# EAGLE board drive (EAGLE 6.2)
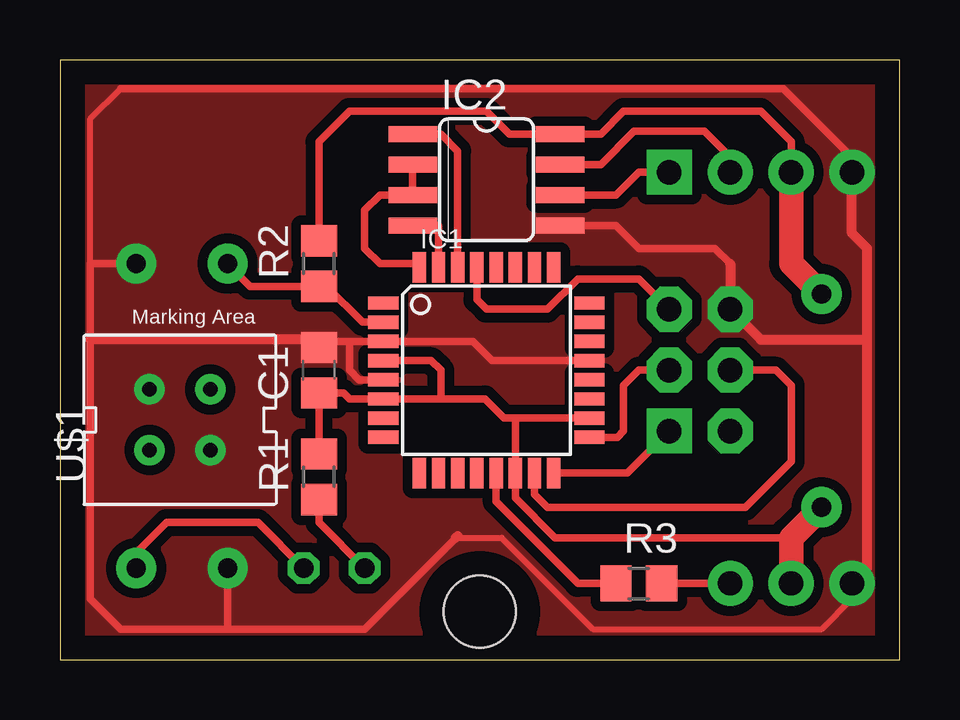
[diagram p0: board, top side]
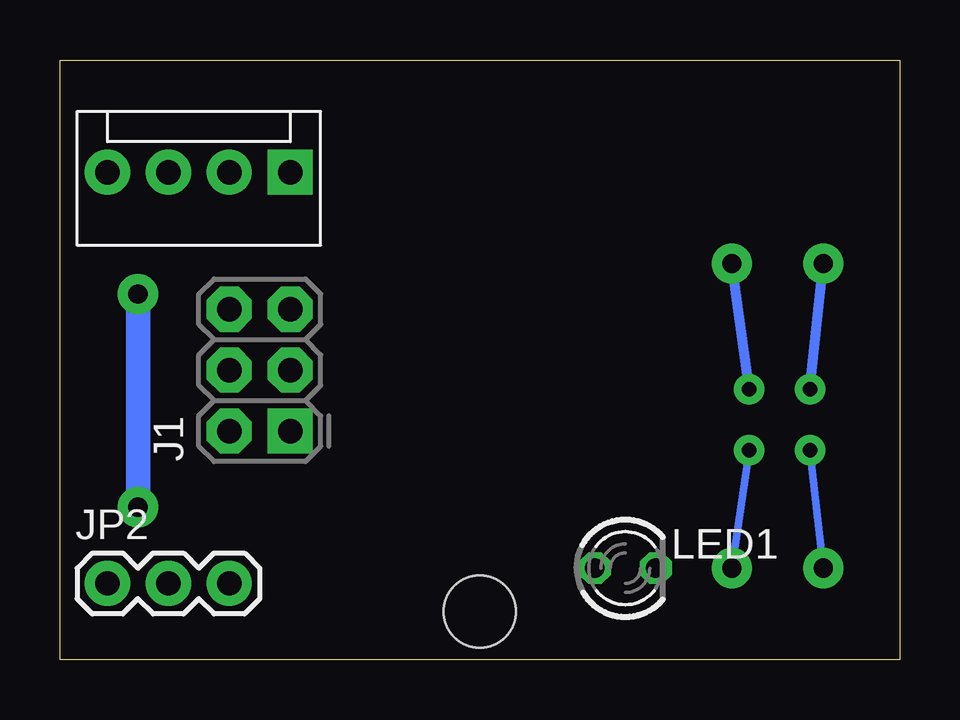
[diagram p1: board, bottom side, seen from below]

Size 35 x 25 mm. Coordinates in mm from the lower left corner, seen from the top.
Outline: 0,0 35,0 35,25 0,25 0,0
Copper layers (1*16): Top 0.035mm / dielectric 1.5mm / Bottom 0.035mm
Design rules "default *": minimum track width 0.25mm, minimum drill 0.5mm, track to track 8mil, track to pad 8mil, pad to pad 8mil, via to via 8mil, smd to smd 8mil, copper to edge 40mil, drill to drill 8mil, minimum pad ring 10mil, minimum via ring 8mil, stop-mask expansion 4mil, vias tented up to drill 0mil, thermal gap 10mil
Holes 3 mm at 17.5,2

## Footprints (pad centres in the part's own frame; a part is rotated, then mirrored left to right if it is on the bottom)
C0805 = smd 1.3 x 1.5: 1 -0.95,0; 2 0.95,0
TQFP32-08 = smd 1.27 x 0.559: 1 -4.293,2.8; 2 -4.293,2; 3 -4.293,1.2; 4 -4.293,0.4; 5 -4.293,-0.4; 6 -4.293,-1.2; 7 -4.293,-2; 8 -4.293,-2.8; 17 4.293,-2.8; 18 4.293,-2; 19 4.293,-1.2; 20 4.293,-0.4; 21 4.293,0.4; 22 4.293,1.2; 23 4.293,2; 24 4.293,2.8 | smd 0.559 x 1.27: 9 -2.8,-4.293; 10 -2,-4.293; 11 -1.2,-4.293; 12 -0.4,-4.293; 13 0.4,-4.293; 14 1.2,-4.293; 15 2,-4.293; 16 2.8,-4.293; 25 2.8,4.293; 26 2,4.293; 27 1.2,4.293; 28 0.4,4.293; 29 -0.4,4.293; 30 -1.2,4.293; 31 -2,4.293; 32 -2.8,4.293
SO08 = smd 0.66 x 2.032: 1 -1.905,-3.073; 2 -0.635,-3.073; 3 0.635,-3.073; 4 1.905,-3.073; 5 1.905,3.073; 6 0.635,3.073; 7 -0.635,3.073; 8 -1.905,3.073
2X3-NS = drill 1.016 pad 1.88 square: 1 -2.54,-1.27 | drill 1.016 pad 1.88 octagon: 2 -2.54,1.27; 3 0,-1.27; 4 0,1.27; 5 2.54,-1.27; 6 2.54,1.27
MOLEX-1X4 = drill 1.016 pad 1.88 square: 1 0,0 | drill 1.016 pad 1.88: 2 2.54,0; 3 5.08,0; 4 7.62,0
1X03 = drill 1.016 pad 1.88: 1 0,0; 2 2.54,0; 3 5.08,0
LED3MM = drill 0.813 octagon: A -1.27,0; K 1.27,0
R0805 = smd 1.3 x 1.5: 1 -0.95,0; 2 0.95,0
4 = drill 0.61 pad 1.27: A -1.27,1.27; C 1.27,-1.27; E 1.27,1.27; K -1.27,-1.27

## Placement (x,y rotation side)
C1  100nF  [C0805]  10.79,12.06 90 top
IC1  MEGA8-AI  [TQFP32-08]  17.78,12.06 0 top
IC2  MAX1483ESA  [SO08]  17.78,20 270 top
J1  AVR_SPI_PRG_6NS  [2X3-NS]  26.67,12.06 90 bottom
JP1  [MOLEX-1X4]  25.4,20.32 180 bottom
JP2  [1X03]  33.02,3.17 0 bottom
LED1  3MM RED / 20mA, 1.8V  [LED3MM]  11.43,3.81 0 bottom
R1  200  [R0805]  10.79,7.62 90 top
R2  12k  [R0805]  10.79,16.51 90 top
R3  1k  [R0805]  24.13,3.17 0 top
U$1  CNY70  [4]  5,10 90 top

## Library data of the parts
C1 R1-R3 = rcl
IC1 = atmel; MPN: ATMEGA8-16AU; OC_FARNELL: 9171371; OC_NEWARK: 73M8863
IC2 = maxim; MF: MAXIM; MPN: MAX481CSA; OC_FARNELL: unknown; OC_NEWARK: 90C3817
J1 JP1 JP2 = SparkFun
LED1 = led
U$1 = cny70

## Nets
+5V: C1.1 IC1.4 IC1.6 IC1.14 IC1.18 IC2.8 JP1.3 JP2.2 R1.2 R2.2
D+: IC2.6 JP1.1
D-: IC2.7 JP1.2
GND: C1.2 IC1.3 IC1.5 IC1.21 IC2.5 J1.6 JP1.4 JP2.1 U$1.E U$1.K
MISO: IC1.16 J1.1
MOSI: IC1.15 J1.4
N$1: JP2.3 R3.2
N$2: LED1.K U$1.A
N$3: LED1.A R1.1
RESET: IC1.29 J1.5
RX: IC1.30 IC2.1
SCK: IC1.17 J1.3
SENSOR: IC1.2 R2.1 U$1.C
SERVO: IC1.13 R3.1
TX: IC1.31 IC2.4
TXEN: IC1.32 IC2.2 IC2.3

## Tracks (layer width: path | path; a pad name or v marks a point on that pad's centre or on a via)
+5V  (via drill 0.8 pad 1.68)
  Top 0.305: 15.88,10.87 IC1.6 12.06,10.87 11.81,11.12 C1.1 R1.2 | IC1.4 15.47,12.46 15.88,12.06 15.88,10.87 | 19.05,10.06 18.51,10.06 17.71,10.87 15.88,10.87 | 19.05,10.06 IC1.18 | 19.05,10.06 18.98,9.99 IC1.14 18.98,6.74 20.64,5.08 30.48,5.08 | R2.2 10.79,21.59 12.06,22.86 17.78,22.86 18.73,21.91 IC2.8 22.54,21.91 23.5,22.86 29.21,22.86 30.48,21.59 JP1.3
  Top 0.406: 30.48,4.13 JP2.2
  Top 1.016: JP2.2 30.48,5.08 v31.75,6.35 | JP1.3 30.48,16.51 v31.75,15.24
  Bottom 1.016: v31.75,15.24 v31.75,6.35
D+
  Top 0.305: IC2.6 23.18,19.37 24.13,20.32 JP1.1
D-
  Top 0.305: IC2.7 22.54,20.64 23.93,22.02 26.87,22.02 27.94,20.95 JP1.2
GND  (via drill 0.8 pad 1.68)
  Top 0.254: JP2.1 33.02,2.54 31.75,1.27 22.23,1.27 18.41,5.08 16.51,5.08 | 33.02,20.95 JP1.4 | 2.54,23.81 1.27,22.54 1.27,16.51
  Top 0.305: 12.06,13.27 IC1.3 17.21,13.27 18.02,12.46 IC1.21 | 16.51,5.08 12.7,1.27 6.99,1.27 | 6.99,1.27 2.54,1.27 1.27,2.54 1.27,13.34 1.27,16.51 v3.17,16.51 | 33.02,20.95 30.16,23.81 2.54,23.81 | IC1.5 12.46,11.66 12.06,12.06 12.06,13.27 | 6.99,1.27 v6.99,3.81 | 12.06,13.27 11.04,13.27 | IC2.5 23.18,18.1 24.13,17.14 27.3,17.14 27.94,16.51
  Top 0.406: 16.51,5.08 16.58,5.15 | JP2.1 33.66,3.81 33.66,13.34 | 33.66,13.34 33.66,17.14 33.02,17.78 JP1.4 | 1.27,13.34 10.79,13.34 C1.2 11.04,13.27 | 27.94,16.51 J1.6 29.21,13.34 33.66,13.34
  Bottom 0.305: U$1.K v6.99,3.81
  Bottom 0.406: U$1.E v3.17,16.51
  pour Top (isolate 0.406, no thermals): 0,25.4 0,0 35.24,0 35.24,25.4
MISO
  Top 0.305: IC1.16 23.65,7.77 J1.1
MOSI
  Top 0.305: IC1.15 19.78,6.89 20.32,6.35 28.57,6.35 30.48,8.26 30.48,11.43 29.84,12.06 J1.4
N$1
  Top 0.305: R3.2 JP2.3
N$2  (via drill 0.8 pad 1.68)
  Top 0.305: v3.17,3.81 3.17,4.45 4.45,5.71 8.26,5.71 LED1.K
  Bottom 0.305: U$1.A v3.17,3.81
N$3
  Top 0.305: R1.1 10.79,5.71 LED1.A
RESET
  Top 0.305: IC1.29 17.38,15.01 17.78,14.61 20.32,14.61 21.59,15.88 24.13,15.88 J1.5
RX
  Top 0.305: IC1.30 16.58,21.2 15.88,21.91 IC2.1
SCK
  Top 0.305: IC1.17 23.23,9.27 23.5,9.53 23.5,11.43 24.13,12.06 J1.3
SENSOR  (via drill 0.8 pad 1.68)
  Top 0.305: IC1.2 12.61,14.06 11.11,15.56 R2.1 7.93,15.56 v6.99,16.51
  Bottom 0.406: U$1.C v6.99,16.51
SERVO
  Top 0.305: IC1.13 18.18,6.58 21.59,3.17 R3.1
TX
  Top 0.305: IC2.4 15.78,18.1 IC1.31
TXEN
  Top 0.305: IC2.2 IC2.3 13.34,19.37 12.7,18.73 12.7,17.14 13.34,16.51 14.83,16.51
  Top 0.406: 14.83,16.51 IC1.32